# EAGLE board routetest (EAGLE 6.0)
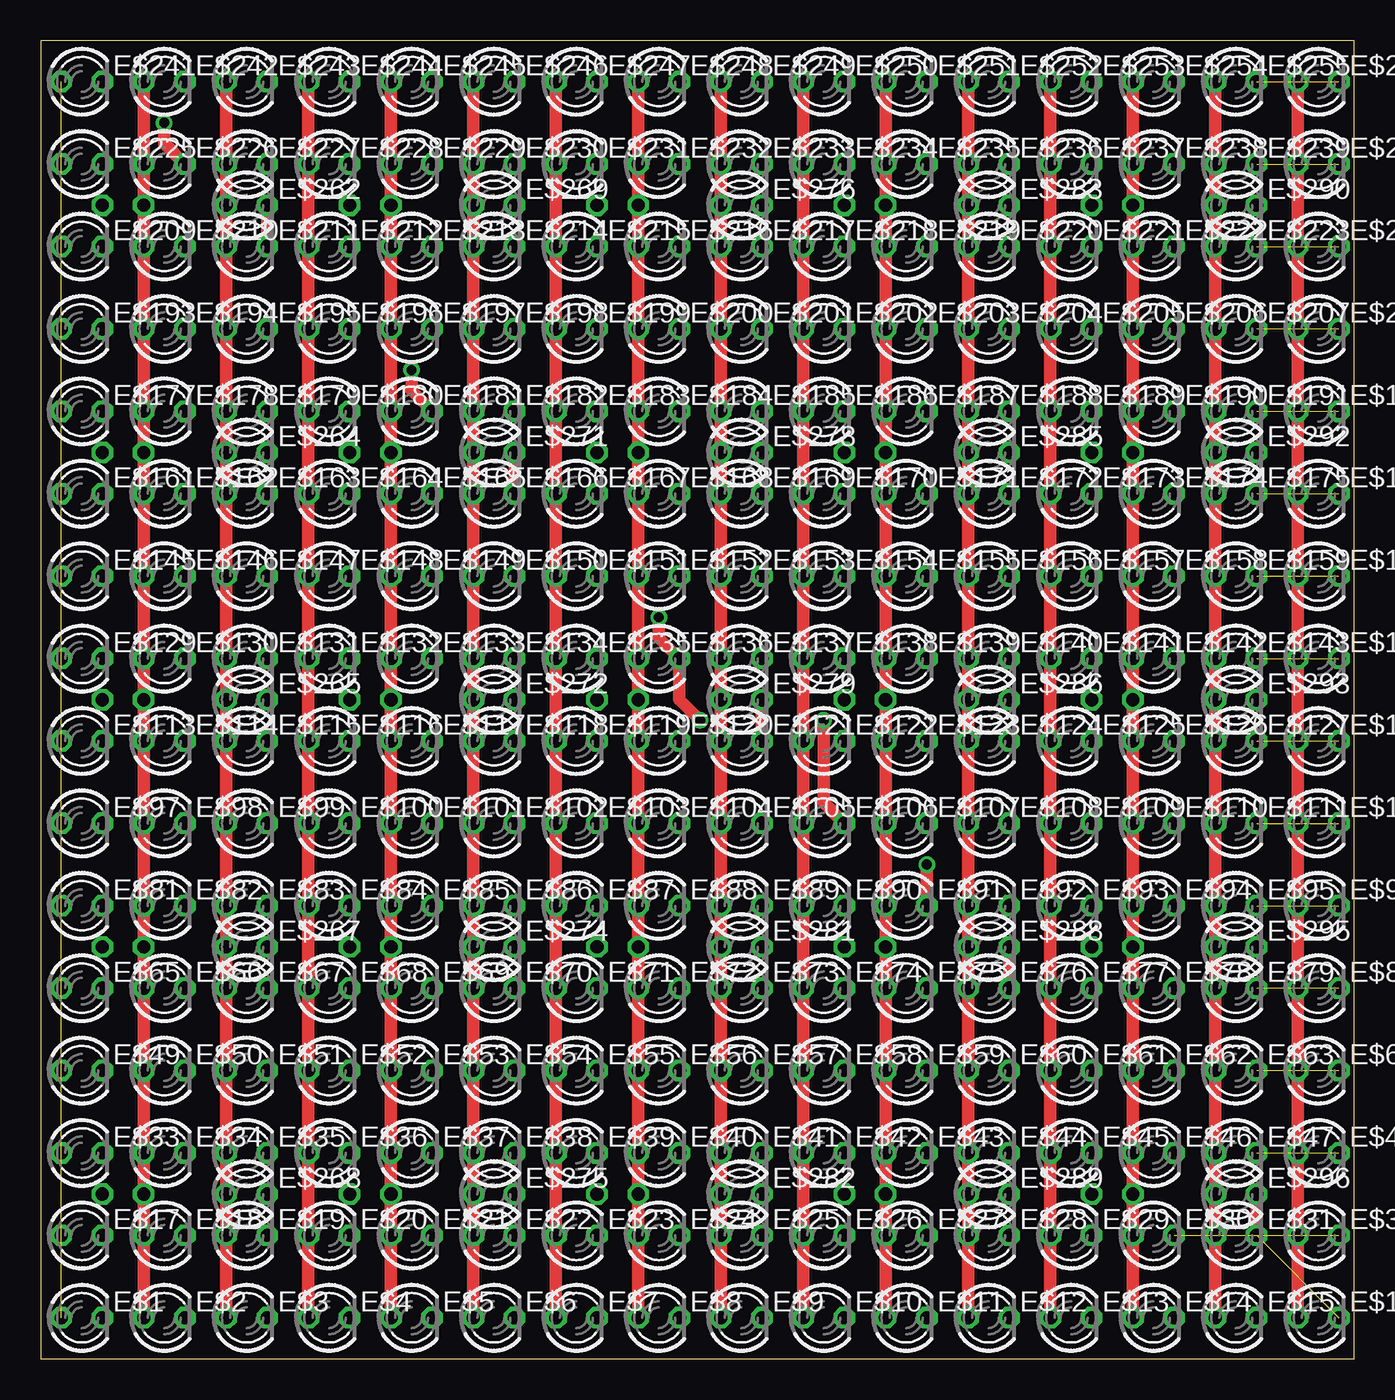
[diagram p0: board, top side]
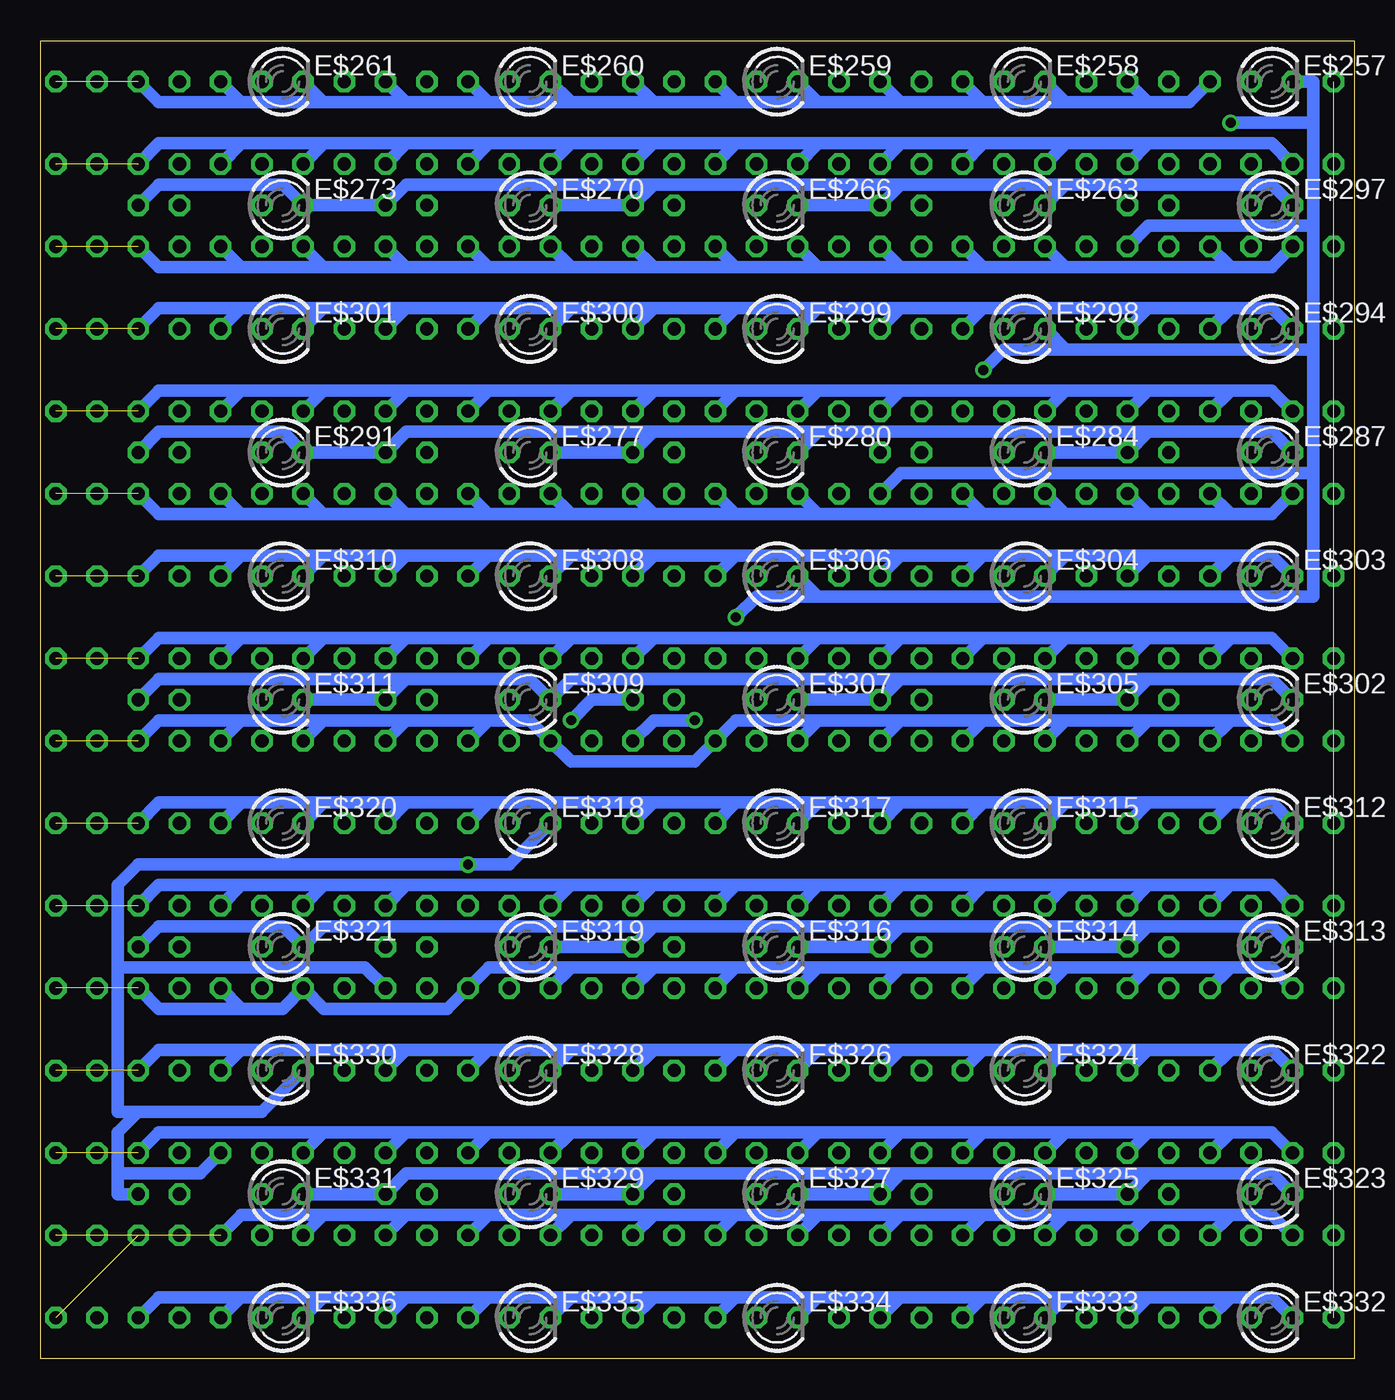
[diagram p1: board, bottom side, seen from below]

Size 80.95 x 81.27 mm. Coordinates in mm from the lower left corner, seen from the top.
Outline: 0,0 80.95,0 80.95,81.27 0,81.27 0,0
Copper layers (1*16): Top 0.035mm / dielectric 1.5mm / Bottom 0.035mm
Design rules: minimum track width 30mil, minimum drill 24mil, track to track 8mil, track to pad 8mil, pad to pad 8mil, via to via 8mil, smd to smd 8mil, copper to edge 40mil, drill to drill 8mil, minimum pad ring 10mil, minimum via ring 8mil, stop-mask expansion 4mil, vias tented up to drill 0mil, thermal gap 10mil

## Footprints (pad centres in the part's own frame; a part is rotated, then mirrored left to right if it is on the bottom)
LED3MM = drill 0.813 octagon: A -1.27,0; K 1.27,0

## Placement (x,y rotation side)
E$1  [LED3MM]  2.54,2.54 0 top
E$2  [LED3MM]  7.62,2.54 0 top
E$3  [LED3MM]  12.7,2.54 0 top
E$4  [LED3MM]  17.78,2.54 0 top
E$5  [LED3MM]  22.86,2.54 0 top
E$6  [LED3MM]  27.94,2.54 0 top
E$7  [LED3MM]  33.02,2.54 0 top
E$8  [LED3MM]  38.1,2.54 0 top
E$9  [LED3MM]  43.18,2.54 0 top
E$10  [LED3MM]  48.26,2.54 0 top
E$11  [LED3MM]  53.34,2.54 0 top
E$12  [LED3MM]  58.42,2.54 0 top
E$13  [LED3MM]  63.5,2.54 0 top
E$14  [LED3MM]  68.58,2.54 0 top
E$15  [LED3MM]  73.66,2.54 0 top
E$16  [LED3MM]  78.74,2.54 0 top
E$17  [LED3MM]  2.54,7.62 0 top
E$18  [LED3MM]  7.62,7.62 0 top
E$19  [LED3MM]  12.7,7.62 0 top
E$20  [LED3MM]  17.78,7.62 0 top
E$21  [LED3MM]  22.86,7.62 0 top
E$22  [LED3MM]  27.94,7.62 0 top
E$23  [LED3MM]  33.02,7.62 0 top
E$24  [LED3MM]  38.1,7.62 0 top
E$25  [LED3MM]  43.18,7.62 0 top
E$26  [LED3MM]  48.26,7.62 0 top
E$27  [LED3MM]  53.34,7.62 0 top
E$28  [LED3MM]  58.42,7.62 0 top
E$29  [LED3MM]  63.5,7.62 0 top
E$30  [LED3MM]  68.58,7.62 0 top
E$31  [LED3MM]  73.66,7.62 0 top
E$32  [LED3MM]  78.74,7.62 0 top
E$33  [LED3MM]  2.54,12.7 0 top
E$34  [LED3MM]  7.62,12.7 0 top
E$35  [LED3MM]  12.7,12.7 0 top
E$36  [LED3MM]  17.78,12.7 0 top
E$37  [LED3MM]  22.86,12.7 0 top
E$38  [LED3MM]  27.94,12.7 0 top
E$39  [LED3MM]  33.02,12.7 0 top
E$40  [LED3MM]  38.1,12.7 0 top
E$41  [LED3MM]  43.18,12.7 0 top
E$42  [LED3MM]  48.26,12.7 0 top
E$43  [LED3MM]  53.34,12.7 0 top
E$44  [LED3MM]  58.42,12.7 0 top
E$45  [LED3MM]  63.5,12.7 0 top
E$46  [LED3MM]  68.58,12.7 0 top
E$47  [LED3MM]  73.66,12.7 0 top
E$48  [LED3MM]  78.74,12.7 0 top
E$49  [LED3MM]  2.54,17.78 0 top
E$50  [LED3MM]  7.62,17.78 0 top
E$51  [LED3MM]  12.7,17.78 0 top
E$52  [LED3MM]  17.78,17.78 0 top
E$53  [LED3MM]  22.86,17.78 0 top
E$54  [LED3MM]  27.94,17.78 0 top
E$55  [LED3MM]  33.02,17.78 0 top
E$56  [LED3MM]  38.1,17.78 0 top
E$57  [LED3MM]  43.18,17.78 0 top
E$58  [LED3MM]  48.26,17.78 0 top
E$59  [LED3MM]  53.34,17.78 0 top
E$60  [LED3MM]  58.42,17.78 0 top
E$61  [LED3MM]  63.5,17.78 0 top
E$62  [LED3MM]  68.58,17.78 0 top
E$63  [LED3MM]  73.66,17.78 0 top
E$64  [LED3MM]  78.74,17.78 0 top
E$65  [LED3MM]  2.54,22.86 0 top
E$66  [LED3MM]  7.62,22.86 0 top
E$67  [LED3MM]  12.7,22.86 0 top
E$68  [LED3MM]  17.78,22.86 0 top
E$69  [LED3MM]  22.86,22.86 0 top
E$70  [LED3MM]  27.94,22.86 0 top
E$71  [LED3MM]  33.02,22.86 0 top
E$72  [LED3MM]  38.1,22.86 0 top
E$73  [LED3MM]  43.18,22.86 0 top
E$74  [LED3MM]  48.26,22.86 0 top
E$75  [LED3MM]  53.34,22.86 0 top
E$76  [LED3MM]  58.42,22.86 0 top
E$77  [LED3MM]  63.5,22.86 0 top
E$78  [LED3MM]  68.58,22.86 0 top
E$79  [LED3MM]  73.66,22.86 0 top
E$80  [LED3MM]  78.74,22.86 0 top
E$81  [LED3MM]  2.54,27.94 0 top
E$82  [LED3MM]  7.62,27.94 0 top
E$83  [LED3MM]  12.7,27.94 0 top
E$84  [LED3MM]  17.78,27.94 0 top
E$85  [LED3MM]  22.86,27.94 0 top
E$86  [LED3MM]  27.94,27.94 0 top
E$87  [LED3MM]  33.02,27.94 0 top
E$88  [LED3MM]  38.1,27.94 0 top
E$89  [LED3MM]  43.18,27.94 0 top
E$90  [LED3MM]  48.26,27.94 0 top
E$91  [LED3MM]  53.34,27.94 0 top
E$92  [LED3MM]  58.42,27.94 0 top
E$93  [LED3MM]  63.5,27.94 0 top
E$94  [LED3MM]  68.58,27.94 0 top
E$95  [LED3MM]  73.66,27.94 0 top
E$96  [LED3MM]  78.74,27.94 0 top
E$97  [LED3MM]  2.54,33.02 0 top
E$98  [LED3MM]  7.62,33.02 0 top
E$99  [LED3MM]  12.7,33.02 0 top
E$100  [LED3MM]  17.78,33.02 0 top
E$101  [LED3MM]  22.86,33.02 0 top
E$102  [LED3MM]  27.94,33.02 0 top
E$103  [LED3MM]  33.02,33.02 0 top
E$104  [LED3MM]  38.1,33.02 0 top
E$105  [LED3MM]  43.18,33.02 0 top
E$106  [LED3MM]  48.26,33.02 0 top
E$107  [LED3MM]  53.34,33.02 0 top
E$108  [LED3MM]  58.42,33.02 0 top
E$109  [LED3MM]  63.5,33.02 0 top
E$110  [LED3MM]  68.58,33.02 0 top
E$111  [LED3MM]  73.66,33.02 0 top
E$112  [LED3MM]  78.74,33.02 0 top
E$113  [LED3MM]  2.54,38.1 0 top
E$114  [LED3MM]  7.62,38.1 0 top
E$115  [LED3MM]  12.7,38.1 0 top
E$116  [LED3MM]  17.78,38.1 0 top
E$117  [LED3MM]  22.86,38.1 0 top
E$118  [LED3MM]  27.94,38.1 0 top
E$119  [LED3MM]  33.02,38.1 0 top
E$120  [LED3MM]  38.1,38.1 0 top
E$121  [LED3MM]  43.18,38.1 0 top
E$122  [LED3MM]  48.26,38.1 0 top
E$123  [LED3MM]  53.34,38.1 0 top
E$124  [LED3MM]  58.42,38.1 0 top
E$125  [LED3MM]  63.5,38.1 0 top
E$126  [LED3MM]  68.58,38.1 0 top
E$127  [LED3MM]  73.66,38.1 0 top
E$128  [LED3MM]  78.74,38.1 0 top
E$129  [LED3MM]  2.54,43.18 0 top
E$130  [LED3MM]  7.62,43.18 0 top
E$131  [LED3MM]  12.7,43.18 0 top
E$132  [LED3MM]  17.78,43.18 0 top
E$133  [LED3MM]  22.86,43.18 0 top
E$134  [LED3MM]  27.94,43.18 0 top
E$135  [LED3MM]  33.02,43.18 0 top
E$136  [LED3MM]  38.1,43.18 0 top
E$137  [LED3MM]  43.18,43.18 0 top
E$138  [LED3MM]  48.26,43.18 0 top
E$139  [LED3MM]  53.34,43.18 0 top
E$140  [LED3MM]  58.42,43.18 0 top
E$141  [LED3MM]  63.5,43.18 0 top
E$142  [LED3MM]  68.58,43.18 0 top
E$143  [LED3MM]  73.66,43.18 0 top
E$144  [LED3MM]  78.74,43.18 0 top
E$145  [LED3MM]  2.54,48.26 0 top
E$146  [LED3MM]  7.62,48.26 0 top
E$147  [LED3MM]  12.7,48.26 0 top
E$148  [LED3MM]  17.78,48.26 0 top
E$149  [LED3MM]  22.86,48.26 0 top
E$150  [LED3MM]  27.94,48.26 0 top
E$151  [LED3MM]  33.02,48.26 0 top
E$152  [LED3MM]  38.1,48.26 0 top
E$153  [LED3MM]  43.18,48.26 0 top
E$154  [LED3MM]  48.26,48.26 0 top
E$155  [LED3MM]  53.34,48.26 0 top
E$156  [LED3MM]  58.42,48.26 0 top
E$157  [LED3MM]  63.5,48.26 0 top
E$158  [LED3MM]  68.58,48.26 0 top
E$159  [LED3MM]  73.66,48.26 0 top
E$160  [LED3MM]  78.74,48.26 0 top
E$161  [LED3MM]  2.54,53.34 0 top
E$162  [LED3MM]  7.62,53.34 0 top
E$163  [LED3MM]  12.7,53.34 0 top
E$164  [LED3MM]  17.78,53.34 0 top
E$165  [LED3MM]  22.86,53.34 0 top
E$166  [LED3MM]  27.94,53.34 0 top
E$167  [LED3MM]  33.02,53.34 0 top
E$168  [LED3MM]  38.1,53.34 0 top
E$169  [LED3MM]  43.18,53.34 0 top
E$170  [LED3MM]  48.26,53.34 0 top
E$171  [LED3MM]  53.34,53.34 0 top
E$172  [LED3MM]  58.42,53.34 0 top
E$173  [LED3MM]  63.5,53.34 0 top
E$174  [LED3MM]  68.58,53.34 0 top
E$175  [LED3MM]  73.66,53.34 0 top
E$176  [LED3MM]  78.74,53.34 0 top
E$177  [LED3MM]  2.54,58.42 0 top
E$178  [LED3MM]  7.62,58.42 0 top
E$179  [LED3MM]  12.7,58.42 0 top
E$180  [LED3MM]  17.78,58.42 0 top
E$181  [LED3MM]  22.86,58.42 0 top
E$182  [LED3MM]  27.94,58.42 0 top
E$183  [LED3MM]  33.02,58.42 0 top
E$184  [LED3MM]  38.1,58.42 0 top
E$185  [LED3MM]  43.18,58.42 0 top
E$186  [LED3MM]  48.26,58.42 0 top
E$187  [LED3MM]  53.34,58.42 0 top
E$188  [LED3MM]  58.42,58.42 0 top
E$189  [LED3MM]  63.5,58.42 0 top
E$190  [LED3MM]  68.58,58.42 0 top
E$191  [LED3MM]  73.66,58.42 0 top
E$192  [LED3MM]  78.74,58.42 0 top
E$193  [LED3MM]  2.54,63.5 0 top
E$194  [LED3MM]  7.62,63.5 0 top
E$195  [LED3MM]  12.7,63.5 0 top
E$196  [LED3MM]  17.78,63.5 0 top
E$197  [LED3MM]  22.86,63.5 0 top
E$198  [LED3MM]  27.94,63.5 0 top
E$199  [LED3MM]  33.02,63.5 0 top
E$200  [LED3MM]  38.1,63.5 0 top
E$201  [LED3MM]  43.18,63.5 0 top
E$202  [LED3MM]  48.26,63.5 0 top
E$203  [LED3MM]  53.34,63.5 0 top
E$204  [LED3MM]  58.42,63.5 0 top
E$205  [LED3MM]  63.5,63.5 0 top
E$206  [LED3MM]  68.58,63.5 0 top
E$207  [LED3MM]  73.66,63.5 0 top
E$208  [LED3MM]  78.74,63.5 0 top
E$209  [LED3MM]  2.54,68.58 0 top
E$210  [LED3MM]  7.62,68.58 0 top
E$211  [LED3MM]  12.7,68.58 0 top
E$212  [LED3MM]  17.78,68.58 0 top
E$213  [LED3MM]  22.86,68.58 0 top
E$214  [LED3MM]  27.94,68.58 0 top
E$215  [LED3MM]  33.02,68.58 0 top
E$216  [LED3MM]  38.1,68.58 0 top
E$217  [LED3MM]  43.18,68.58 0 top
E$218  [LED3MM]  48.26,68.58 0 top
E$219  [LED3MM]  53.34,68.58 0 top
E$220  [LED3MM]  58.42,68.58 0 top
E$221  [LED3MM]  63.5,68.58 0 top
E$222  [LED3MM]  68.58,68.58 0 top
E$223  [LED3MM]  73.66,68.58 0 top
E$224  [LED3MM]  78.74,68.58 0 top
E$225  [LED3MM]  2.54,73.66 0 top
E$226  [LED3MM]  7.62,73.66 0 top
E$227  [LED3MM]  12.7,73.66 0 top
E$228  [LED3MM]  17.78,73.66 0 top
E$229  [LED3MM]  22.86,73.66 0 top
E$230  [LED3MM]  27.94,73.66 0 top
E$231  [LED3MM]  33.02,73.66 0 top
E$232  [LED3MM]  38.1,73.66 0 top
E$233  [LED3MM]  43.18,73.66 0 top
E$234  [LED3MM]  48.26,73.66 0 top
E$235  [LED3MM]  53.34,73.66 0 top
E$236  [LED3MM]  58.42,73.66 0 top
E$237  [LED3MM]  63.5,73.66 0 top
E$238  [LED3MM]  68.58,73.66 0 top
E$239  [LED3MM]  73.66,73.66 0 top
E$240  [LED3MM]  78.74,73.66 0 top
E$241  [LED3MM]  2.54,78.74 0 top
E$242  [LED3MM]  7.62,78.74 0 top
E$243  [LED3MM]  12.7,78.74 0 top
E$244  [LED3MM]  17.78,78.74 0 top
E$245  [LED3MM]  22.86,78.74 0 top
E$246  [LED3MM]  27.94,78.74 0 top
E$247  [LED3MM]  33.02,78.74 0 top
E$248  [LED3MM]  38.1,78.74 0 top
E$249  [LED3MM]  43.18,78.74 0 top
E$250  [LED3MM]  48.26,78.74 0 top
E$251  [LED3MM]  53.34,78.74 0 top
E$252  [LED3MM]  58.42,78.74 0 top
E$253  [LED3MM]  63.5,78.74 0 top
E$254  [LED3MM]  68.58,78.74 0 top
E$255  [LED3MM]  73.66,78.74 0 top
E$256  [LED3MM]  78.74,78.74 0 top
E$257  [LED3MM]  5.08,78.74 0 bottom
E$258  [LED3MM]  20.32,78.74 0 bottom
E$259  [LED3MM]  35.56,78.74 0 bottom
E$260  [LED3MM]  50.8,78.74 0 bottom
E$261  [LED3MM]  66.04,78.74 0 bottom
E$262  [LED3MM]  12.7,71.12 0 top
E$263  [LED3MM]  20.32,71.12 0 bottom
E$264  [LED3MM]  12.7,55.88 0 top
E$265  [LED3MM]  12.7,40.64 0 top
E$266  [LED3MM]  35.56,71.12 0 bottom
E$267  [LED3MM]  12.7,25.4 0 top
E$268  [LED3MM]  12.7,10.16 0 top
E$269  [LED3MM]  27.94,71.12 0 top
E$270  [LED3MM]  50.8,71.12 0 bottom
E$271  [LED3MM]  27.94,55.88 0 top
E$272  [LED3MM]  27.94,40.64 0 top
E$273  [LED3MM]  66.04,71.12 0 bottom
E$274  [LED3MM]  27.94,25.4 0 top
E$275  [LED3MM]  27.94,10.16 0 top
E$276  [LED3MM]  43.18,71.12 0 top
E$277  [LED3MM]  50.8,55.88 0 bottom
E$278  [LED3MM]  43.18,55.88 0 top
E$279  [LED3MM]  43.18,40.64 0 top
E$280  [LED3MM]  35.56,55.88 0 bottom
E$281  [LED3MM]  43.18,25.4 0 top
E$282  [LED3MM]  43.18,10.16 0 top
E$283  [LED3MM]  58.42,71.12 0 top
E$284  [LED3MM]  20.32,55.88 0 bottom
E$285  [LED3MM]  58.42,55.88 0 top
E$286  [LED3MM]  58.42,40.64 0 top
E$287  [LED3MM]  5.08,55.88 0 bottom
E$288  [LED3MM]  58.42,25.4 0 top
E$289  [LED3MM]  58.42,10.16 0 top
E$290  [LED3MM]  73.66,71.12 0 top
E$291  [LED3MM]  66.04,55.88 0 bottom
E$292  [LED3MM]  73.66,55.88 0 top
E$293  [LED3MM]  73.66,40.64 0 top
E$294  [LED3MM]  5.08,63.5 0 bottom
E$295  [LED3MM]  73.66,25.4 0 top
E$296  [LED3MM]  73.66,10.16 0 top
E$297  [LED3MM]  5.08,71.12 0 bottom
E$298  [LED3MM]  20.32,63.5 0 bottom
E$299  [LED3MM]  35.56,63.5 0 bottom
E$300  [LED3MM]  50.8,63.5 0 bottom
E$301  [LED3MM]  66.04,63.5 0 bottom
E$302  [LED3MM]  5.08,40.64 0 bottom
E$303  [LED3MM]  5.08,48.26 0 bottom
E$304  [LED3MM]  20.32,48.26 0 bottom
E$305  [LED3MM]  20.32,40.64 0 bottom
E$306  [LED3MM]  35.56,48.26 0 bottom
E$307  [LED3MM]  35.56,40.64 0 bottom
E$308  [LED3MM]  50.8,48.26 0 bottom
E$309  [LED3MM]  50.8,40.64 0 bottom
E$310  [LED3MM]  66.04,48.26 0 bottom
E$311  [LED3MM]  66.04,40.64 0 bottom
E$312  [LED3MM]  5.08,33.02 0 bottom
E$313  [LED3MM]  5.08,25.4 0 bottom
E$314  [LED3MM]  20.32,25.4 0 bottom
E$315  [LED3MM]  20.32,33.02 0 bottom
E$316  [LED3MM]  35.56,25.4 0 bottom
E$317  [LED3MM]  35.56,33.02 0 bottom
E$318  [LED3MM]  50.8,33.02 0 bottom
E$319  [LED3MM]  50.8,25.4 0 bottom
E$320  [LED3MM]  66.04,33.02 0 bottom
E$321  [LED3MM]  66.04,25.4 0 bottom
E$322  [LED3MM]  5.08,17.78 0 bottom
E$323  [LED3MM]  5.08,10.16 0 bottom
E$324  [LED3MM]  20.32,17.78 0 bottom
E$325  [LED3MM]  20.32,10.16 0 bottom
E$326  [LED3MM]  35.56,17.78 0 bottom
E$327  [LED3MM]  35.56,10.16 0 bottom
E$328  [LED3MM]  50.8,17.78 0 bottom
E$329  [LED3MM]  50.8,10.16 0 bottom
E$330  [LED3MM]  66.04,17.78 0 bottom
E$331  [LED3MM]  66.04,10.16 0 bottom
E$332  [LED3MM]  5.08,2.54 0 bottom
E$333  [LED3MM]  20.32,2.54 0 bottom
E$334  [LED3MM]  35.56,2.54 0 bottom
E$335  [LED3MM]  50.8,2.54 0 bottom
E$336  [LED3MM]  66.04,2.54 0 bottom

## Library data of the parts
E$1-E$336 = led

## Nets
S$1: E$1.A E$17.A E$33.A E$49.A E$65.A E$81.A E$97.A E$113.A E$129.A E$145.A E$161.A E$177.A E$193.A E$209.A E$225.A E$241.A
S$2: E$2.A E$18.A E$34.A E$50.A E$66.A E$82.A E$98.A E$114.A E$130.A E$146.A E$162.A E$178.A E$194.A E$210.A E$226.A E$242.A E$257.A E$287.A E$294.A E$297.A E$302.A E$303.A E$312.A E$313.A E$322.A E$323.A E$332.A
S$3: E$3.A E$19.A E$35.A E$51.A E$67.A E$83.A E$99.A E$115.A E$131.A E$147.A E$163.A E$179.A E$195.A E$211.A E$227.A E$243.A E$262.A E$264.A E$265.A E$267.A E$268.A
S$4: E$4.A E$20.A E$36.A E$52.A E$68.A E$84.A E$100.A E$116.A E$132.A E$148.A E$164.A E$180.A E$196.A E$212.A E$228.A E$244.A
S$5: E$5.A E$21.A E$37.A E$53.A E$69.A E$85.A E$101.A E$117.A E$133.A E$149.A E$165.A E$181.A E$197.A E$213.A E$229.A E$245.A E$258.A E$263.A E$284.A E$298.A E$304.A E$305.A E$314.A E$315.A E$324.A E$325.A E$333.A
S$6: E$6.A E$22.A E$38.A E$54.A E$70.A E$86.A E$102.A E$118.A E$134.A E$150.A E$166.A E$182.A E$198.A E$214.A E$230.A E$246.A E$269.A E$271.A E$272.A E$274.A E$275.A
S$7: E$7.A E$23.A E$39.A E$55.A E$71.A E$87.A E$103.A E$119.A E$135.A E$151.A E$167.A E$183.A E$199.A E$215.A E$231.A E$247.A
S$8: E$8.A E$24.A E$40.A E$56.A E$72.A E$88.A E$104.A E$120.A E$136.A E$152.A E$168.A E$184.A E$200.A E$216.A E$232.A E$248.A E$259.A E$266.A E$280.A E$299.A E$306.A E$307.A E$316.A E$317.A E$326.A E$327.A E$334.A
S$9: E$9.A E$25.A E$41.A E$57.A E$73.A E$89.A E$105.A E$121.A E$137.A E$153.A E$169.A E$185.A E$201.A E$217.A E$233.A E$249.A E$276.A E$278.A E$279.A E$281.A E$282.A
S$10: E$10.A E$26.A E$42.A E$58.A E$74.A E$90.A E$106.A E$122.A E$138.A E$154.A E$170.A E$186.A E$202.A E$218.A E$234.A E$250.A
S$11: E$11.A E$27.A E$43.A E$59.A E$75.A E$91.A E$107.A E$123.A E$139.A E$155.A E$171.A E$187.A E$203.A E$219.A E$235.A E$251.A E$260.A E$270.A E$277.A E$300.A E$308.A E$309.A E$318.A E$319.A E$328.A E$329.A E$335.A
S$12: E$12.A E$28.A E$44.A E$60.A E$76.A E$92.A E$108.A E$124.A E$140.A E$156.A E$172.A E$188.A E$204.A E$220.A E$236.A E$252.A E$283.A E$285.A E$286.A E$288.A E$289.A
S$13: E$13.A E$29.A E$45.A E$61.A E$77.A E$93.A E$109.A E$125.A E$141.A E$157.A E$173.A E$189.A E$205.A E$221.A E$237.A E$253.A
S$14: E$14.A E$30.A E$46.A E$62.A E$78.A E$94.A E$110.A E$126.A E$142.A E$158.A E$174.A E$190.A E$206.A E$222.A E$238.A E$254.A E$261.A E$273.A E$291.A E$301.A E$310.A E$311.A E$320.A E$321.A E$330.A E$331.A E$336.A
S$15: E$15.A E$31.A E$47.A E$63.A E$79.A E$95.A E$111.A E$127.A E$143.A E$159.A E$175.A E$191.A E$207.A E$223.A E$239.A E$255.A E$290.A E$292.A E$293.A E$295.A E$296.A
S$16: E$16.A E$32.A E$48.A E$64.A E$80.A E$96.A E$112.A E$128.A E$144.A E$160.A E$176.A E$192.A E$208.A E$224.A E$240.A E$256.A
S$17: E$16.K E$31.K E$46.K E$61.K E$76.K E$91.K E$106.K E$121.K E$136.K E$151.K E$166.K E$181.K E$196.K E$211.K E$226.K E$241.K E$257.K E$262.K E$271.K E$279.K E$288.K E$296.K E$298.K E$306.K E$318.K E$330.K
S$18: E$242.K E$243.K E$244.K E$245.K E$246.K E$247.K E$248.K E$249.K E$250.K E$251.K E$252.K E$253.K E$254.K E$255.K E$256.K E$258.K E$259.K E$260.K E$261.K
S$19: E$225.K E$227.K E$228.K E$229.K E$230.K E$231.K E$232.K E$233.K E$234.K E$235.K E$236.K E$237.K E$238.K E$239.K E$240.K
S$20: E$209.K E$210.K E$212.K E$213.K E$214.K E$215.K E$216.K E$217.K E$218.K E$219.K E$220.K E$221.K E$222.K E$223.K E$224.K
S$21: E$193.K E$194.K E$195.K E$197.K E$198.K E$199.K E$200.K E$201.K E$202.K E$203.K E$204.K E$205.K E$206.K E$207.K E$208.K E$294.K E$299.K E$300.K E$301.K
S$22: E$177.K E$178.K E$179.K E$180.K E$182.K E$183.K E$184.K E$185.K E$186.K E$187.K E$188.K E$189.K E$190.K E$191.K E$192.K
S$23: E$161.K E$162.K E$163.K E$164.K E$165.K E$167.K E$168.K E$169.K E$170.K E$171.K E$172.K E$173.K E$174.K E$175.K E$176.K
S$24: E$145.K E$146.K E$147.K E$148.K E$149.K E$150.K E$152.K E$153.K E$154.K E$155.K E$156.K E$157.K E$158.K E$159.K E$160.K E$303.K E$304.K E$308.K E$310.K
S$25: E$129.K E$130.K E$131.K E$132.K E$133.K E$134.K E$135.K E$137.K E$138.K E$139.K E$140.K E$141.K E$142.K E$143.K E$144.K
S$26: E$113.K E$114.K E$115.K E$116.K E$117.K E$118.K E$119.K E$120.K E$122.K E$123.K E$124.K E$125.K E$126.K E$127.K E$128.K
S$27: E$1.K E$2.K E$3.K E$4.K E$5.K E$6.K E$7.K E$8.K E$9.K E$10.K E$11.K E$12.K E$13.K E$14.K E$15.K E$332.K E$333.K E$334.K E$335.K E$336.K
S$28: E$17.K E$18.K E$19.K E$20.K E$21.K E$22.K E$23.K E$24.K E$25.K E$26.K E$27.K E$28.K E$29.K E$30.K E$32.K
S$29: E$33.K E$34.K E$35.K E$36.K E$37.K E$38.K E$39.K E$40.K E$41.K E$42.K E$43.K E$44.K E$45.K E$47.K E$48.K
S$30: E$49.K E$50.K E$51.K E$52.K E$53.K E$54.K E$55.K E$56.K E$57.K E$58.K E$59.K E$60.K E$62.K E$63.K E$64.K E$322.K E$324.K E$326.K E$328.K
S$31: E$65.K E$66.K E$67.K E$68.K E$69.K E$70.K E$71.K E$72.K E$73.K E$74.K E$75.K E$77.K E$78.K E$79.K E$80.K
S$32: E$81.K E$82.K E$83.K E$84.K E$85.K E$86.K E$87.K E$88.K E$89.K E$90.K E$92.K E$93.K E$94.K E$95.K E$96.K
S$33: E$97.K E$98.K E$99.K E$100.K E$101.K E$102.K E$103.K E$104.K E$105.K E$107.K E$108.K E$109.K E$110.K E$111.K E$112.K E$312.K E$315.K E$317.K E$320.K
S$34: E$268.K E$275.K E$282.K E$289.K E$323.K E$325.K E$327.K E$329.K E$331.K
S$35: E$267.K E$274.K E$281.K E$295.K E$313.K E$314.K E$316.K E$319.K E$321.K
S$36: E$265.K E$272.K E$286.K E$293.K E$302.K E$305.K E$307.K E$309.K E$311.K
S$37: E$264.K E$277.K E$278.K E$280.K E$284.K E$285.K E$287.K E$291.K E$292.K
S$38: E$263.K E$266.K E$269.K E$270.K E$273.K E$276.K E$283.K E$290.K E$297.K

## Tracks (layer width: path | path; a pad name or v marks a point on that pad's centre or on a via)
S$1  (15 unrouted)
S$2
  Top 0.762: E$2.A E$18.A E$323.A E$34.A E$50.A E$66.A E$313.A E$82.A E$98.A E$114.A E$302.A E$130.A E$146.A E$162.A E$287.A E$178.A E$194.A E$210.A E$297.A E$226.A E$242.A
S$3
  Top 0.762: E$3.A E$19.A E$268.A E$35.A E$51.A E$67.A E$267.A E$83.A E$99.A E$115.A E$265.A E$131.A E$147.A E$163.A E$264.A E$179.A E$195.A E$211.A E$262.A E$227.A E$243.A
S$4
  Top 0.762: E$244.A E$228.A E$212.A E$196.A E$180.A E$164.A E$148.A E$132.A E$116.A E$100.A E$84.A E$68.A E$52.A E$36.A E$20.A E$4.A
S$5
  Top 0.762: E$5.A E$21.A E$325.A E$37.A E$324.A E$69.A E$314.A E$85.A E$315.A E$117.A E$305.A E$133.A E$304.A E$165.A E$284.A E$181.A E$298.A E$213.A E$263.A E$229.A E$245.A
S$6
  Top 0.762: E$6.A E$22.A E$275.A E$38.A E$54.A E$70.A E$274.A E$86.A E$102.A E$118.A E$272.A E$134.A E$150.A E$166.A E$271.A E$182.A E$198.A E$214.A E$269.A E$230.A E$246.A
S$7
  Top 0.762: E$247.A E$231.A E$215.A E$199.A E$183.A E$167.A E$151.A E$135.A E$119.A E$103.A E$87.A E$71.A E$55.A E$39.A E$23.A E$7.A
S$8
  Top 0.762: E$8.A E$24.A E$327.A E$40.A E$56.A E$72.A E$316.A E$88.A E$104.A E$120.A E$307.A E$136.A E$152.A E$168.A E$280.A E$184.A E$200.A E$216.A E$266.A E$232.A E$248.A
S$9
  Top 0.762: E$9.A E$25.A E$282.A E$41.A E$57.A E$73.A E$281.A E$89.A E$105.A E$121.A E$279.A E$137.A E$153.A E$169.A E$278.A E$185.A E$201.A E$217.A E$276.A E$233.A E$249.A
S$10
  Top 0.762: E$250.A E$234.A E$218.A E$202.A E$186.A E$170.A E$154.A E$138.A E$122.A E$106.A E$90.A E$74.A E$58.A E$42.A E$26.A E$10.A
S$11
  Top 0.762: E$11.A E$27.A E$329.A E$43.A E$328.A E$75.A E$319.A E$91.A E$318.A E$123.A E$309.A E$139.A E$308.A E$171.A E$277.A E$187.A E$300.A E$219.A E$270.A E$235.A E$251.A
S$12
  Top 0.762: E$12.A E$28.A E$289.A E$44.A E$60.A E$76.A E$288.A E$92.A E$108.A E$124.A E$286.A E$140.A E$156.A E$172.A E$285.A E$188.A E$204.A E$220.A E$283.A E$236.A E$252.A
S$13
  Top 0.762: E$253.A E$237.A E$221.A E$205.A E$189.A E$173.A E$157.A E$141.A E$125.A E$109.A E$93.A E$77.A E$61.A E$45.A E$29.A E$13.A
S$14
  Top 0.762: E$14.A E$30.A E$331.A E$46.A E$62.A E$78.A E$321.A E$94.A E$110.A E$126.A E$311.A E$142.A E$158.A E$174.A E$291.A E$190.A E$206.A E$222.A E$273.A E$238.A E$254.A
S$15
  Top 0.762: E$15.A E$31.A E$296.A E$47.A E$63.A E$79.A E$295.A E$95.A E$111.A E$127.A E$293.A E$143.A E$159.A E$175.A E$292.A E$191.A E$207.A E$223.A E$290.A E$239.A E$255.A
S$16
  Top 0.762: E$256.A E$240.A E$224.A E$208.A E$192.A E$176.A E$160.A E$144.A E$128.A E$112.A E$96.A E$80.A E$64.A E$48.A E$32.A E$16.A
S$17  (via drill 0.61)  (1 unrouted)
  Top 0.762: E$288.K E$76.K | E$296.K E$31.K | v54.61,30.48 E$91.K | E$279.K E$121.K | E$262.K E$211.K | E$271.K E$166.K | E$226.K 7.62,74.93 v7.62,76.2 | E$181.K 22.86,59.69 v22.86,60.96 | v38.1,45.72 38.1,44.45 E$136.K 39.37,40.64 v40.64,39.37 | E$318.K 48.26,34.29 v48.26,39.37
  Bottom 0.762: E$330.K 67.31,15.24 74.93,15.24 | 74.93,15.24 76.2,13.97 76.2,11.43 | 76.2,11.43 76.2,10.16 E$296.K | E$46.K 71.12,11.43 76.2,11.43 | E$318.K 52.07,30.48 v54.61,30.48 74.93,30.48 76.2,29.21 76.2,24.13 | 76.2,24.13 76.2,15.24 74.93,15.24 | E$76.K 60.96,24.13 76.2,24.13 | 17.78,62.23 E$298.K | 2.54,62.23 17.78,62.23 | 2.54,76.2 2.54,78.74 E$241.K | 2.54,76.2 2.54,69.85 | 2.54,69.85 2.54,62.23 | 2.54,76.2 v7.62,76.2 | v22.86,60.96 21.59,62.23 17.78,62.23 | 33.02,46.99 E$306.K | 33.02,46.99 2.54,46.99 2.54,54.61 | 2.54,62.23 2.54,54.61 | v38.1,45.72 36.83,46.99 33.02,46.99 | E$166.K 27.94,54.61 2.54,54.61 | E$211.K 12.7,69.85 2.54,69.85 | E$121.K 43.18,39.37 v40.64,39.37 | v48.26,39.37 46.99,40.64 E$279.K
S$18  (1 unrouted)
  Bottom 0.762: E$242.K 10.16,77.47 12.7,77.47 | E$243.K 12.7,77.47 | 17.78,77.47 E$244.K | 12.7,77.47 17.78,77.47 | 22.86,77.47 E$245.K | 17.78,77.47 22.86,77.47 | 27.94,77.47 E$246.K | 22.86,77.47 27.94,77.47 | 33.02,77.47 E$259.K | 27.94,77.47 33.02,77.47 | 38.1,77.47 E$248.K | 33.02,77.47 38.1,77.47 | 43.18,77.47 E$249.K | 38.1,77.47 43.18,77.47 | 48.26,77.47 E$260.K | 43.18,77.47 48.26,77.47 | 53.34,77.47 E$251.K | 48.26,77.47 53.34,77.47 | 58.42,77.47 E$252.K | 53.34,77.47 58.42,77.47 | 63.5,77.47 E$261.K | 58.42,77.47 63.5,77.47 | 68.58,77.47 E$254.K | 63.5,77.47 68.58,77.47 | E$255.K 73.66,77.47 68.58,77.47
S$19  (1 unrouted)
  Bottom 0.762: E$225.K 5.08,74.93 12.7,74.93 | E$227.K 12.7,74.93 | 17.78,74.93 E$228.K | 12.7,74.93 17.78,74.93 | 22.86,74.93 E$229.K | 17.78,74.93 22.86,74.93 | 27.94,74.93 E$230.K | 22.86,74.93 27.94,74.93 | 33.02,74.93 E$231.K | 27.94,74.93 33.02,74.93 | 38.1,74.93 E$232.K | 33.02,74.93 38.1,74.93 | 43.18,74.93 E$233.K | 38.1,74.93 43.18,74.93 | 48.26,74.93 E$234.K | 43.18,74.93 48.26,74.93 | 53.34,74.93 E$235.K | 48.26,74.93 53.34,74.93 | 58.42,74.93 E$236.K | 53.34,74.93 58.42,74.93 | 63.5,74.93 E$237.K | 58.42,74.93 63.5,74.93 | 68.58,74.93 E$238.K | 63.5,74.93 68.58,74.93 | E$239.K 73.66,74.93 68.58,74.93
S$20  (1 unrouted)
  Bottom 0.762: E$209.K 5.08,67.31 7.62,67.31 | E$210.K 7.62,67.31 | 17.78,67.31 E$212.K | 7.62,67.31 17.78,67.31 | 22.86,67.31 E$213.K | 17.78,67.31 22.86,67.31 | 27.94,67.31 E$214.K | 22.86,67.31 27.94,67.31 | 33.02,67.31 E$215.K | 27.94,67.31 33.02,67.31 | 38.1,67.31 E$216.K | 33.02,67.31 38.1,67.31 | 43.18,67.31 E$217.K | 38.1,67.31 43.18,67.31 | 48.26,67.31 E$218.K | 43.18,67.31 48.26,67.31 | 53.34,67.31 E$219.K | 48.26,67.31 53.34,67.31 | 58.42,67.31 E$220.K | 53.34,67.31 58.42,67.31 | 63.5,67.31 E$221.K | 58.42,67.31 63.5,67.31 | 68.58,67.31 E$222.K | 63.5,67.31 68.58,67.31 | E$223.K 73.66,67.31 68.58,67.31
S$21  (1 unrouted)
  Bottom 0.762: E$294.K 5.08,64.77 7.62,64.77 | E$194.K 7.62,64.77 | 12.7,64.77 E$195.K | 7.62,64.77 12.7,64.77 | 22.86,64.77 E$197.K | 12.7,64.77 22.86,64.77 | 27.94,64.77 E$198.K | 22.86,64.77 27.94,64.77 | 33.02,64.77 E$299.K | 27.94,64.77 33.02,64.77 | 38.1,64.77 E$200.K | 33.02,64.77 38.1,64.77 | 43.18,64.77 E$201.K | 38.1,64.77 43.18,64.77 | 48.26,64.77 E$300.K | 43.18,64.77 48.26,64.77 | 53.34,64.77 E$203.K | 48.26,64.77 53.34,64.77 | 58.42,64.77 E$204.K | 53.34,64.77 58.42,64.77 | 63.5,64.77 E$301.K | 58.42,64.77 63.5,64.77 | 68.58,64.77 E$206.K | 63.5,64.77 68.58,64.77 | E$207.K 73.66,64.77 68.58,64.77
S$22  (1 unrouted)
  Bottom 0.762: E$177.K 5.08,59.69 7.62,59.69 | E$178.K 7.62,59.69 | 12.7,59.69 E$179.K | 7.62,59.69 12.7,59.69 | 17.78,59.69 E$180.K | 12.7,59.69 17.78,59.69 | 27.94,59.69 E$182.K | 17.78,59.69 27.94,59.69 | 33.02,59.69 E$183.K | 27.94,59.69 33.02,59.69 | 38.1,59.69 E$184.K | 33.02,59.69 38.1,59.69 | 43.18,59.69 E$185.K | 38.1,59.69 43.18,59.69 | 48.26,59.69 E$186.K | 43.18,59.69 48.26,59.69 | 53.34,59.69 E$187.K | 48.26,59.69 53.34,59.69 | 58.42,59.69 E$188.K | 53.34,59.69 58.42,59.69 | 63.5,59.69 E$189.K | 58.42,59.69 63.5,59.69 | 68.58,59.69 E$190.K | 63.5,59.69 68.58,59.69 | E$191.K 73.66,59.69 68.58,59.69
S$23  (1 unrouted)
  Bottom 0.762: E$161.K 5.08,52.07 7.62,52.07 | E$162.K 7.62,52.07 | 12.7,52.07 E$163.K | 7.62,52.07 12.7,52.07 | 17.78,52.07 E$164.K | 12.7,52.07 17.78,52.07 | 22.86,52.07 E$165.K | 17.78,52.07 22.86,52.07 | 33.02,52.07 E$167.K | 22.86,52.07 33.02,52.07 | 38.1,52.07 E$168.K | 33.02,52.07 38.1,52.07 | 43.18,52.07 E$169.K | 38.1,52.07 43.18,52.07 | 48.26,52.07 E$170.K | 43.18,52.07 48.26,52.07 | 53.34,52.07 E$171.K | 48.26,52.07 53.34,52.07 | 58.42,52.07 E$172.K | 53.34,52.07 58.42,52.07 | 63.5,52.07 E$173.K | 58.42,52.07 63.5,52.07 | 68.58,52.07 E$174.K | 63.5,52.07 68.58,52.07 | E$175.K 73.66,52.07 68.58,52.07
S$24  (1 unrouted)
  Bottom 0.762: E$145.K 5.08,49.53 7.62,49.53 | E$146.K 7.62,49.53 | 12.7,49.53 E$147.K | 7.62,49.53 12.7,49.53 | 17.78,49.53 E$148.K | 12.7,49.53 17.78,49.53 | 22.86,49.53 E$149.K | 17.78,49.53 22.86,49.53 | 27.94,49.53 E$150.K | 22.86,49.53 27.94,49.53 | 38.1,49.53 E$152.K | 27.94,49.53 38.1,49.53 | 43.18,49.53 E$153.K | 38.1,49.53 43.18,49.53 | 48.26,49.53 E$154.K | 43.18,49.53 48.26,49.53 | 53.34,49.53 E$155.K | 48.26,49.53 53.34,49.53 | 58.42,49.53 E$156.K | 53.34,49.53 58.42,49.53 | 63.5,49.53 E$157.K | 58.42,49.53 63.5,49.53 | 68.58,49.53 E$158.K | 63.5,49.53 68.58,49.53 | E$159.K 73.66,49.53 68.58,49.53
S$25  (1 unrouted)
  Bottom 0.762: E$129.K 5.08,44.45 7.62,44.45 | E$130.K 7.62,44.45 | 12.7,44.45 E$131.K | 7.62,44.45 12.7,44.45 | 17.78,44.45 E$132.K | 12.7,44.45 17.78,44.45 | 22.86,44.45 E$133.K | 17.78,44.45 22.86,44.45 | 27.94,44.45 E$134.K | 22.86,44.45 27.94,44.45 | 33.02,44.45 E$135.K | 27.94,44.45 33.02,44.45 | 43.18,44.45 E$137.K | 33.02,44.45 43.18,44.45 | 48.26,44.45 E$138.K | 43.18,44.45 48.26,44.45 | 53.34,44.45 E$139.K | 48.26,44.45 53.34,44.45 | 58.42,44.45 E$140.K | 53.34,44.45 58.42,44.45 | 63.5,44.45 E$141.K | 58.42,44.45 63.5,44.45 | 68.58,44.45 E$142.K | 63.5,44.45 68.58,44.45 | E$143.K 73.66,44.45 68.58,44.45
S$26  (1 unrouted)
  Bottom 0.762: 53.34,39.37 50.8,39.37 E$122.K 48.26,36.83 40.64,36.83 E$120.K 38.1,39.37 33.02,39.37 | E$123.K 53.34,39.37 | 58.42,39.37 E$124.K | 53.34,39.37 58.42,39.37 | 63.5,39.37 E$125.K | 58.42,39.37 63.5,39.37 | 68.58,39.37 E$126.K | 63.5,39.37 68.58,39.37 | E$127.K 73.66,39.37 68.58,39.37 | E$113.K 5.08,39.37 7.62,39.37 | E$114.K 7.62,39.37 | 12.7,39.37 E$115.K | 7.62,39.37 12.7,39.37 | 17.78,39.37 E$116.K | 12.7,39.37 17.78,39.37 | 22.86,39.37 E$117.K | 17.78,39.37 22.86,39.37 | 27.94,39.37 E$118.K | 22.86,39.37 27.94,39.37 | 33.02,39.37 E$119.K | 27.94,39.37 33.02,39.37
S$27
  Bottom 0.762: E$1.K 5.08,3.81 7.62,3.81 | E$2.K 7.62,3.81 | 12.7,3.81 E$3.K | 7.62,3.81 12.7,3.81 | 17.78,3.81 E$4.K | 12.7,3.81 17.78,3.81 | 22.86,3.81 E$5.K | 17.78,3.81 22.86,3.81 | 27.94,3.81 E$6.K | 22.86,3.81 27.94,3.81 | 33.02,3.81 E$7.K | 27.94,3.81 33.02,3.81 | 38.1,3.81 E$8.K | 33.02,3.81 38.1,3.81 | 43.18,3.81 E$9.K | 38.1,3.81 43.18,3.81 | 48.26,3.81 E$10.K | 43.18,3.81 48.26,3.81 | 53.34,3.81 E$11.K | 48.26,3.81 53.34,3.81 | 58.42,3.81 E$12.K | 53.34,3.81 58.42,3.81 | 63.5,3.81 E$13.K | 58.42,3.81 63.5,3.81 | 68.58,3.81 E$14.K | 63.5,3.81 68.58,3.81 | E$15.K 73.66,3.81 68.58,3.81
S$28  (1 unrouted)
  Bottom 0.762: E$17.K 5.08,8.89 7.62,8.89 | E$18.K 7.62,8.89 | 12.7,8.89 E$19.K | 7.62,8.89 12.7,8.89 | 17.78,8.89 E$20.K | 12.7,8.89 17.78,8.89 | 22.86,8.89 E$21.K | 17.78,8.89 22.86,8.89 | 27.94,8.89 E$22.K | 22.86,8.89 27.94,8.89 | 33.02,8.89 E$23.K | 27.94,8.89 33.02,8.89 | 38.1,8.89 E$24.K | 33.02,8.89 38.1,8.89 | 43.18,8.89 E$25.K | 38.1,8.89 43.18,8.89 | 48.26,8.89 E$26.K | 43.18,8.89 48.26,8.89 | 53.34,8.89 E$27.K | 48.26,8.89 53.34,8.89 | 58.42,8.89 E$28.K | 53.34,8.89 58.42,8.89 | 63.5,8.89 E$29.K | 58.42,8.89 63.5,8.89 | E$30.K 68.58,8.89 63.5,8.89
S$29  (1 unrouted)
  Bottom 0.762: E$33.K 5.08,13.97 7.62,13.97 | E$34.K 7.62,13.97 | 12.7,13.97 E$35.K | 7.62,13.97 12.7,13.97 | 17.78,13.97 E$36.K | 12.7,13.97 17.78,13.97 | 22.86,13.97 E$37.K | 17.78,13.97 22.86,13.97 | 27.94,13.97 E$38.K | 22.86,13.97 27.94,13.97 | 33.02,13.97 E$39.K | 27.94,13.97 33.02,13.97 | 38.1,13.97 E$40.K | 33.02,13.97 38.1,13.97 | 43.18,13.97 E$41.K | 38.1,13.97 43.18,13.97 | 48.26,13.97 E$42.K | 43.18,13.97 48.26,13.97 | 53.34,13.97 E$43.K | 48.26,13.97 53.34,13.97 | 58.42,13.97 E$44.K | 53.34,13.97 58.42,13.97 | 63.5,13.97 E$45.K | 58.42,13.97 63.5,13.97 | E$47.K 73.66,13.97 63.5,13.97
S$30  (1 unrouted)
  Bottom 0.762: E$322.K 5.08,19.05 7.62,19.05 | E$50.K 7.62,19.05 | 12.7,19.05 E$51.K | 7.62,19.05 12.7,19.05 | 17.78,19.05 E$324.K | 12.7,19.05 17.78,19.05 | 22.86,19.05 E$53.K | 17.78,19.05 22.86,19.05 | 27.94,19.05 E$54.K | 22.86,19.05 27.94,19.05 | 33.02,19.05 E$326.K | 27.94,19.05 33.02,19.05 | 38.1,19.05 E$56.K | 33.02,19.05 38.1,19.05 | 43.18,19.05 E$57.K | 38.1,19.05 43.18,19.05 | 48.26,19.05 E$328.K | 43.18,19.05 48.26,19.05 | 53.34,19.05 E$59.K | 48.26,19.05 53.34,19.05 | 58.42,19.05 E$60.K | 53.34,19.05 58.42,19.05 | 68.58,19.05 E$62.K | 58.42,19.05 68.58,19.05 | E$63.K 73.66,19.05 68.58,19.05
S$31  (1 unrouted)
  Bottom 0.762: 68.58,21.59 66.04,21.59 E$77.K 63.5,21.59 55.88,21.59 E$75.K 53.34,24.13 48.26,24.13 | E$78.K 68.58,21.59 | E$79.K 73.66,21.59 68.58,21.59 | E$65.K 5.08,24.13 7.62,24.13 | E$66.K 7.62,24.13 | 12.7,24.13 E$67.K | 7.62,24.13 12.7,24.13 | 17.78,24.13 E$68.K | 12.7,24.13 17.78,24.13 | 22.86,24.13 E$69.K | 17.78,24.13 22.86,24.13 | 27.94,24.13 E$70.K | 22.86,24.13 27.94,24.13 | 33.02,24.13 E$71.K | 27.94,24.13 33.02,24.13 | 38.1,24.13 E$72.K | 33.02,24.13 38.1,24.13 | 43.18,24.13 E$73.K | 38.1,24.13 43.18,24.13 | 48.26,24.13 E$74.K | 43.18,24.13 48.26,24.13
S$32  (1 unrouted)
  Bottom 0.762: E$81.K 5.08,29.21 7.62,29.21 | E$82.K 7.62,29.21 | 12.7,29.21 E$83.K | 7.62,29.21 12.7,29.21 | 17.78,29.21 E$84.K | 12.7,29.21 17.78,29.21 | 22.86,29.21 E$85.K | 17.78,29.21 22.86,29.21 | 27.94,29.21 E$86.K | 22.86,29.21 27.94,29.21 | 33.02,29.21 E$87.K | 27.94,29.21 33.02,29.21 | 38.1,29.21 E$88.K | 33.02,29.21 38.1,29.21 | 43.18,29.21 E$89.K | 38.1,29.21 43.18,29.21 | 48.26,29.21 E$90.K | 43.18,29.21 48.26,29.21 | 58.42,29.21 E$92.K | 48.26,29.21 58.42,29.21 | 63.5,29.21 E$93.K | 58.42,29.21 63.5,29.21 | 68.58,29.21 E$94.K | 63.5,29.21 68.58,29.21 | E$95.K 73.66,29.21 68.58,29.21
S$33  (1 unrouted)
  Bottom 0.762: E$97.K 5.08,34.29 7.62,34.29 | E$98.K 7.62,34.29 | 12.7,34.29 E$99.K | 7.62,34.29 12.7,34.29 | 17.78,34.29 E$315.K | 12.7,34.29 17.78,34.29 | 22.86,34.29 E$101.K | 17.78,34.29 22.86,34.29 | 27.94,34.29 E$102.K | 22.86,34.29 27.94,34.29 | 33.02,34.29 E$317.K | 27.94,34.29 33.02,34.29 | 38.1,34.29 E$104.K | 33.02,34.29 38.1,34.29 | 43.18,34.29 E$105.K | 38.1,34.29 43.18,34.29 | 53.34,34.29 E$107.K | 43.18,34.29 53.34,34.29 | 58.42,34.29 E$108.K | 53.34,34.29 58.42,34.29 | 63.5,34.29 E$320.K | 58.42,34.29 63.5,34.29 | 68.58,34.29 E$110.K | 63.5,34.29 68.58,34.29 | E$111.K 73.66,34.29 68.58,34.29
S$34
  Bottom 0.762: E$331.K E$289.K 58.42,11.43 43.18,11.43 | E$329.K E$282.K 43.18,11.43 | E$327.K E$275.K 27.94,11.43 | E$323.K 5.08,11.43 12.7,11.43 | 12.7,11.43 E$268.K E$325.K | 12.7,11.43 27.94,11.43 | 27.94,11.43 43.18,11.43
S$35
  Bottom 0.762: E$295.K 73.66,26.67 66.04,26.67 E$321.K 63.5,26.67 43.18,26.67 | E$319.K E$281.K 43.18,26.67 | E$316.K E$274.K 27.94,26.67 | E$313.K 5.08,26.67 12.7,26.67 | 12.7,26.67 E$267.K E$314.K | 12.7,26.67 27.94,26.67 | 27.94,26.67 43.18,26.67
S$36
  Bottom 0.762: 58.42,41.91 50.8,41.91 E$309.K 48.26,41.91 27.94,41.91 | 58.42,41.91 E$286.K E$311.K | E$293.K 73.66,41.91 58.42,41.91 | E$307.K E$272.K 27.94,41.91 | E$302.K 5.08,41.91 12.7,41.91 | 12.7,41.91 E$265.K E$305.K | 12.7,41.91 27.94,41.91
S$37
  Bottom 0.762: E$292.K 73.66,57.15 66.04,57.15 E$291.K E$285.K 58.42,57.15 43.18,57.15 | E$277.K E$278.K 43.18,57.15 | E$287.K 5.08,57.15 12.7,57.15 | 12.7,57.15 E$264.K E$284.K | 33.02,57.15 E$280.K | 12.7,57.15 33.02,57.15 | 33.02,57.15 43.18,57.15
S$38
  Bottom 0.762: E$290.K 73.66,72.39 66.04,72.39 E$273.K E$283.K 58.42,72.39 43.18,72.39 | E$270.K E$276.K 43.18,72.39 | E$266.K E$269.K 27.94,72.39 | E$297.K 5.08,72.39 17.78,72.39 | E$263.K 17.78,72.39 | 17.78,72.39 27.94,72.39 | 27.94,72.39 43.18,72.39